# Altium PCB Voltage Reg.PcbDoc
Units mm, origin at the board's own origin, x right, y up, seen from the top; angles counter-clockwise.
Board outline 20 x 20 mm, 2 copper layers (Top Layer, Bottom Layer); 19 components, 10 nets, 54 pads, 0 vias.
Unrouted connection lines stored in the file: 13.
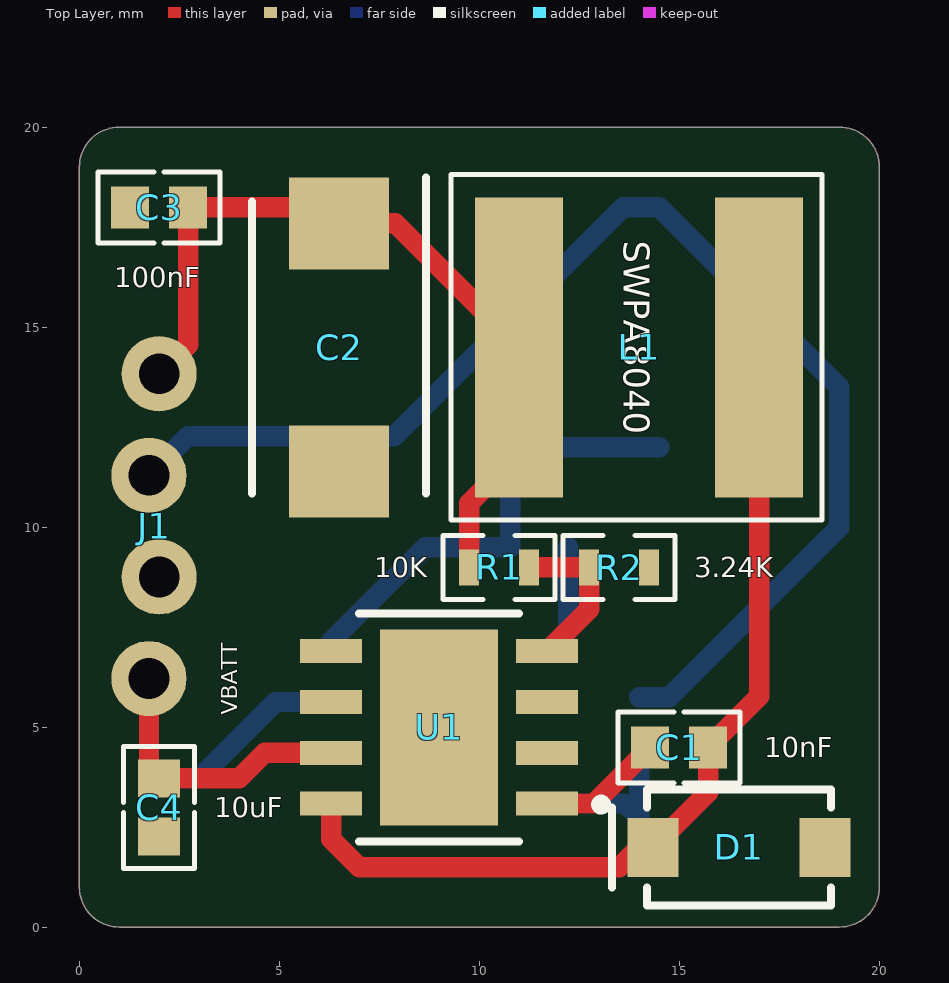
[diagram p0: Top Layer view]
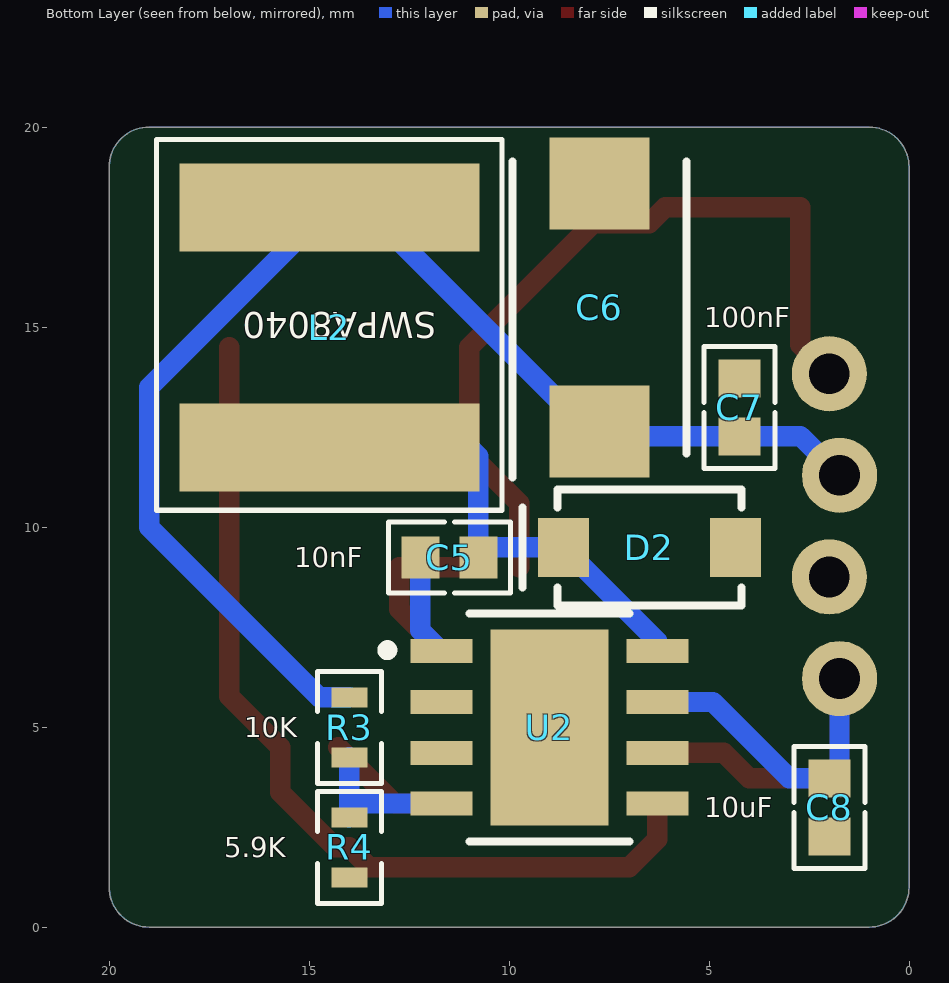
[diagram p1: Bottom Layer view, seen from below]
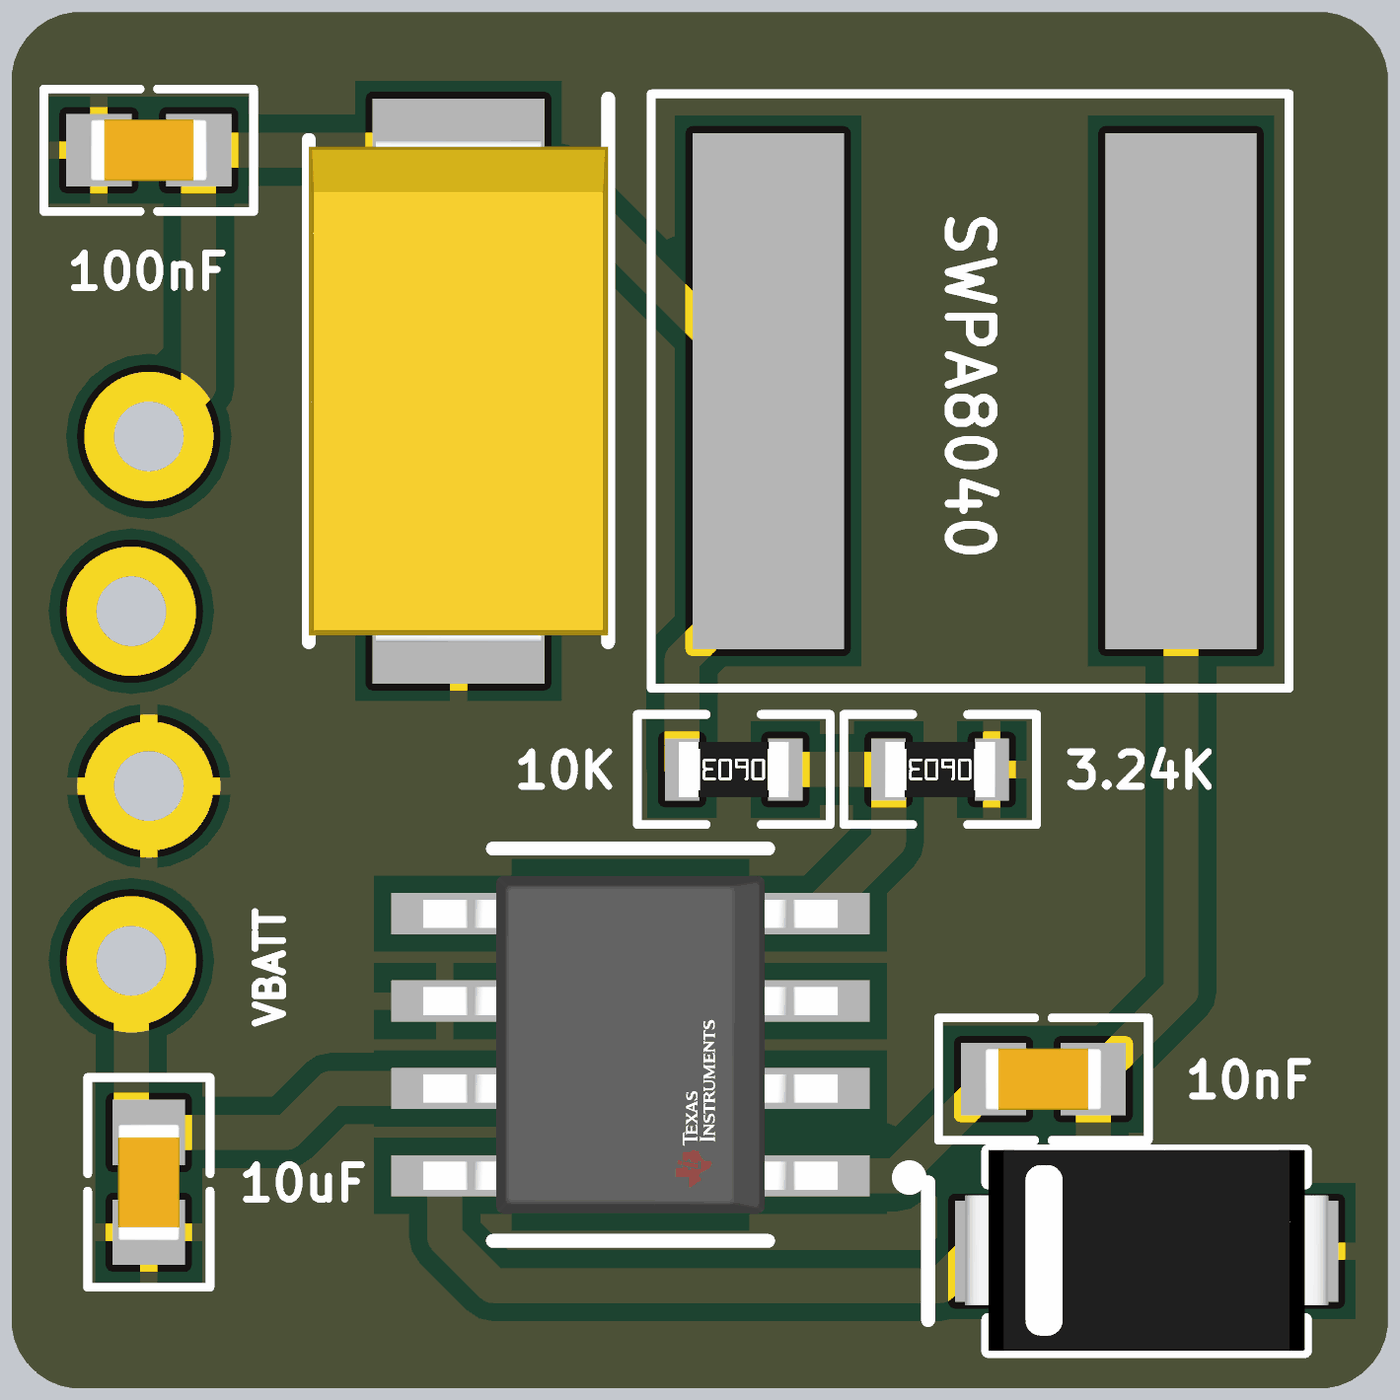
[diagram p2: 3D render of the assembled board from above, using the file's embedded part models]
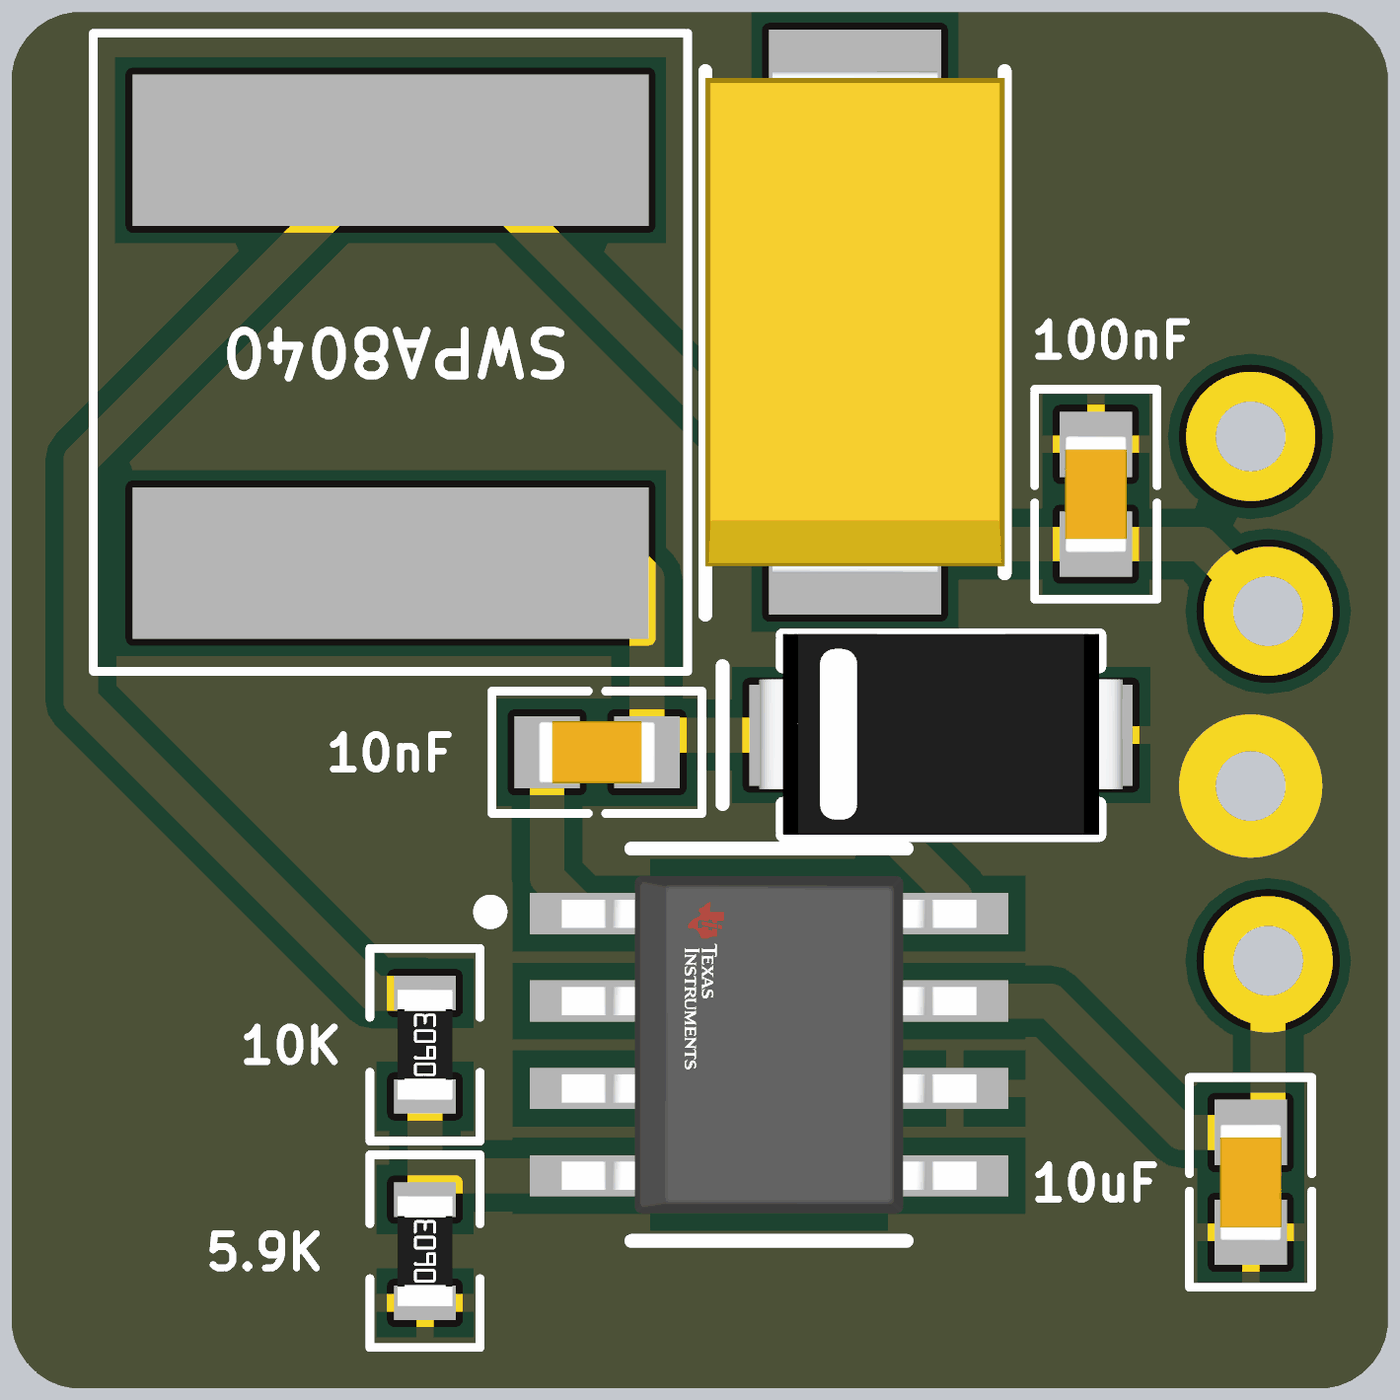
[diagram p3: 3D render of the assembled board from below, using the file's embedded part models]

## Layer stack, top to bottom
Top Solder: solder mask 0.0102, Solder Resist, Dk 3.5
Top Layer: signal copper 0.0356
Dielectric 1: dielectric 0.32, FR-4, Dk 4.8
Bottom Layer: signal copper 0.0356
Bottom Solder: solder mask 0.0102, Solder Resist, Dk 3.5

## Board outline
1.006,0.006 cw(c1.006,1.006) 0.006,1.006 0.006,19.006 cw(c1.006,19.006) 1.006,20.006 19.006,20.006 cw(c19.006,19.006) 20.006,19.006 20.006,1.006 cw(c19.006,1.006) 19.006,0.006

## Design rules (kind name [scope] priority, off if disabled: settings)
Clearance [All] p1: gap=0.254 ignorepadtopadclearanceinfootprint=TRUE except(0: Arc-Hole Track-Hole SMDPad-Hole THPad-Hole Via-Hole Fill-Hole Poly-Hole Region-Hole Text-Hole)
PolygonConnect [All] p1: connectstyle=Relief reliefconductorwidth=0.254 reliefentries=4 polygonreliefangle="90 Angle" airgapwidth=0.254
RoutingVias [All] p1: holewidth=0.711 width=1.27 viastyle="Through Hole" minholewidth=0.711 minwidth=1.27 maxholewidth=0.711 maxwidth=1.27
SolderMaskExpansion [All] p1: expansion=0.102 istentingtop=FALSE
Width [All] p1: maxlimit=0.508 minlimit=0.254 preferedwidth=0.508
30 further rules are at their usual default settings.

## Components (designator, comment, footprint, x,y, rotation, side; value= is the part's Value field where it differs from the comment)
C1 "10nF" CAPC1608X90X35ML10T15 15,4.5 r180 top
C2 "TAJE107M025RNJ" CAPPM7344X310N 6.5,14.5 r270 top value=100uF
C3 "100nF" CAPC1608X90X35ML10T15 2,18 r0 top
C4 "10uF" CAPC1608X90X35ML10T15 2,3 r90 top
C5 "10nF" CAPC1608X90X35ML10T15 11.5,9.25 r0 bottom
C6 "TAJE107M025RNJ" CAPPM7344X310N 7.75,15.5 r90 bottom value=100uF
C7 "100nF" CAPC1608X90X35ML10T15 4.25,13 r270 bottom
C8 "10uF" CAPC1608X90X35ML10T15 2,3 r90 bottom
D1 "Schotty Diode" SMA-DIODE 16.5,2 r180 top
D2 "Schotty Diode" SMA-DIODE 6.5,9.5 r0 bottom
J1 "CONN_04LOCK" 1X04_LOCK 1.873,6.22 r90 top
L1 "10Uh" SWPA8040 14,14.5 r180 top
L2 "10Uh" SWPA8040 14.5,15 r90 bottom
R1 "10K" RESISTOR0603 10.5,9 r180 top
R2 "3.24K" RESISTOR0603 13.5,9 r180 top
R3 "10K" RESISTOR0603 14,5 r90 bottom
R4 "5.9K" RESISTOR0603 14,2 r90 bottom
U1 "TPS5430" FP-DDA0008J-MFG 9,5 r180 top
U2 "TPS5430" FP-DDA0008J-MFG 9,5 r180 bottom

## Footprints (in the part's own frame and the unit in brackets; to place one, negate y for a bottom-side part, rotate by r counter-clockwise, add the part's x,y. Pads: shape width x height; smd on the part's side, far side on the other; paste and mask are expansions set on the pad)
1X04_LOCK [mil]
  round 74 hole 40: 1(0,5) 2(100,-5) 3(200,5) 4(300,-5)
CAPC1608X90X35ML10T15 [mm] "Chip Capacitor, 2-Leads, Body 1.7x0.9mm, IPC Low Density"
  rect 0.95x1.05 smd: 1(-0.725,0) 2(0.725,0)
  silkscreen extent -1.52,-0.89 1.52,0.89, body extent -0.85,-0.45 0.85,0.45, height 0.9
CAPPM7344X310N [mm]
  rect 2.3x2.5 smd: 1(-3.1,0) 2(3.1,0)
  silkscreen extent -4.25,-2.17 3.65,2.17, body extent -3.65,-2.17 3.65,2.17, height 3.1
FP-DDA0008J-MFG [mm]
  rect 1.55x0.6 smd paste+0 mask+0: 1(-2.7,1.905) 2(-2.7,0.635) 3(-2.7,-0.635) 4(-2.7,-1.905) 5(2.7,-1.905) 6(2.7,-0.635) 7(2.7,0.635) 8(2.7,1.905)
  rect 2.95x4.9 smd paste-1000 mask-1000: 9(0,0)
  silkscreen extent -4.18,-2.85 2,2.85, body extent -3.57,-2.75 3.57,2.75, height 0.25
RESISTOR0603 [mm]
  rect 0.5x0.9 smd: 1(-0.75,0) 2(0.75,0)
  silkscreen extent -1.4,-0.8 1.4,0.8, body extent -0.8,-0.4 0.8,0.4, height 0.47
SMA-DIODE [mm]
  rect 1.27x1.47 smd: 1(-2.15,0) 2(2.15,0)
  silkscreen extent -2.3,-1.45 3.17,1.45, body extent -2.64,-1.47 2.64,1.45, height 2.41
SWPA8040 [mm]
  rect 2.2x7.5 smd: P1(-3,0) P2(3,0)
  silkscreen extent -4.57,-4.32 4.7,4.32, body extent -4,-4 4,4, height 4.15

## Part data
C1 C5: library part CMP-001-00002-4, "CAP 10nF"
C2 C6: library part CMP-092-000000-5, "25V 100UF ±20% TAJE107M025RNJ", Manufacturer_Part_Number=TAJD686K010R, Datasheet Link=http://datasheets.avx.com/TAJ.pdf, Design Item ID=TAJD686K010R, Height=3.1mm, Source=SamacSys.SchLib
C3 C7: library part CMP-001-00005-1, "CAP 100nF"
C4 C8: library part CMP-001-00006-1, "CAP 10uF"
D1 D2: library part CMP-066-000000-4, "SMD", Pin=2
J1: library part CMP-027-000001-1, Package=1X04_LOCK, Component Type=Standard, Design Item ID=CONN_04LOCK, DeviceName=LOCK, DeviceSetName=CONN_04, GateName_1=J1, LibraryName=SparkFun-Connectors, Pin Count=4, PROD_ID=CONN-09696, Source=SparkFun-Connectors.SCHLIB, SymbolName_1=CONN_04
L1 L2: library part CMP-068-000000-6, "Inductor for 5V & 3.3V Buck", ComponentLink1Description=Value, ComponentLink1URL=10uH
R1 R3: library part CMP-009-00000-2, "RES 10K 0603"
R2: library part CMP-009-00002-1, "RES 3.24K 0603"
R4: library part CMP-009-00005-1, "RES 5.9K 0603"
U1 U2: library part CMP-071-000000-7, "Step Down Converter", Package=POWERPAD-SOIC-8, Component Type=Standard, Design Item ID=TPS54X0, DeviceSetName=TPS54X0, GateName_1=G$1, LibraryName=JH, Pin Count=7, SymbolName_1=TPS54X0

## Nets (pads, with @x,y where several pads share a name; then routed paths per layer and width w, separated by ;. In a path a pad name is that pad's centre, name@x,y a point inside that pad or via, vN(x,y) a via of type N, cw(c..) or ccw(c..) an arc to the next point about the centre after c; other vN are vias at no path point)
3.3V: C6.1 C7.2 J1.3 L2.P2 R3.2 | length 32.2
  Bottom Layer w0.508: J1.3 2.721,12.275 4.5,12.275 7.875,12.275 8,12.4 13.6,18 L2.P2 19,13.5 19,10 14.75,5.75 R3.2
5V: C2.1 C3.2 J1.4 L1.P2 R1.2 | length 20.2
  Top Layer w0.508: J1.4 2.725,14.565 C3.2 6.1,18 C2.1 7.9,17.6 L1.P2 11,11.85 9.75,10.6 R1.2
GND: C2.2 C3.1 C4.1 C6.2 C7.1 C8.1 D1.1 D2.1 J1.2 R2.1 R4.1 U1.6 U2.6
NetC1_1: C1.1 D1.2 L1.P1 U1.8 | length 23
  Top Layer w0.508: U1.8 6.3,2.2 7,1.5 13.5,1.5 14,2 D1.2 15.725,3.375 C1.1 17,5.775 L1.P1
NetC1_2: C1.2 U1.1 | length 3.2
  Top Layer w0.508: U1.1 12.87,3.095 C1.2
NetC4_2: C4.2 C8.2 J1.1 U1.7 U2.7 | length 14.9
  Top Layer w0.508: J1.1 1.746,3.979 C4.2 4,3.725 4.64,4.365 U1.7
  Bottom Layer w0.508: J1.1 1.746,3.979 C8.2 3,3.725 4.91,5.635 U2.7
NetC5_1: C5.1 D2.2 L2.P1 U2.8 | length 11.8
  Bottom Layer w0.508: U2.8 6.3,7.15 D2.2 10.775,9.5 10.775,11.775 11,12 L2.P1
NetC5_2: C5.2 U2.1 | length 2.8
  Bottom Layer w0.508: U2.1 12.225,7.43 C5.2@12.225,9.5
NetR1_1: R1.1 R2.2 U1.4 | length 4
  Top Layer w0.508: R1.1 R2.2 12.75,7.955 U1.4
NetR3_1: R3.1 R4.2 U2.4 | length 3.9
  Bottom Layer w0.508: U2.4 13.655,3.095 R4.2 R3.1
pads on no net: U1.2 U1.3 U1.5 U1.9 U2.2 U2.3 U2.5 U2.9

## Polygon pours and split planes (outlines as drawn)
GND on Bottom Layer "NONET_L02_P001" (solid, shelved, pour order 1): 1.006,0.006 cw(c1.006,1.006) 0.006,1.006 0.006,19.006 cw(c1.006,19.006) 1.006,20.006 19.006,20.006 cw(c19.006,19.006) 20.006,19.006 20.006,1.006 cw(c19.006,1.006) 19.006,0.006
GND on Top Layer "NONET_L01_P000" (solid, shelved, pour order 0): 1.006,0.006 cw(c1.006,1.006) 0.006,1.006 0.006,19.006 cw(c1.006,19.006) 1.006,20.006 19.006,20.006 cw(c19.006,19.006) 20.006,19.006 20.006,1.006 cw(c19.006,1.006) 19.006,0.006

## Silkscreen, mask and mechanical layers (free items; w line width, h text height)
Top Overlay:
  text "VBATT" at 3.95,5.317 h0.4 r90
Mechanical 50:
  the board outline again, w0.013

## Text inside footprints (layer, text, board x,y; h text height)
L1: Top Overlay "SWPA8040" at 13.619,17.167 h0.65 r270
L2: Bottom Overlay "SWPA8040" at 11.833,15.381 h0.65 r180